# Altium PCB PCB1.PcbDoc (part 1 of 2)
Units mil, origin at the board's own origin, x right, y up, seen from the top; angles counter-clockwise.
Board outline 2312.99 x 1968.58 mil, 4 copper layers (Top Layer, MidLayer1, MidLayer2, Bottom Layer); 130 components, 134 nets, 621 pads, 156 vias.
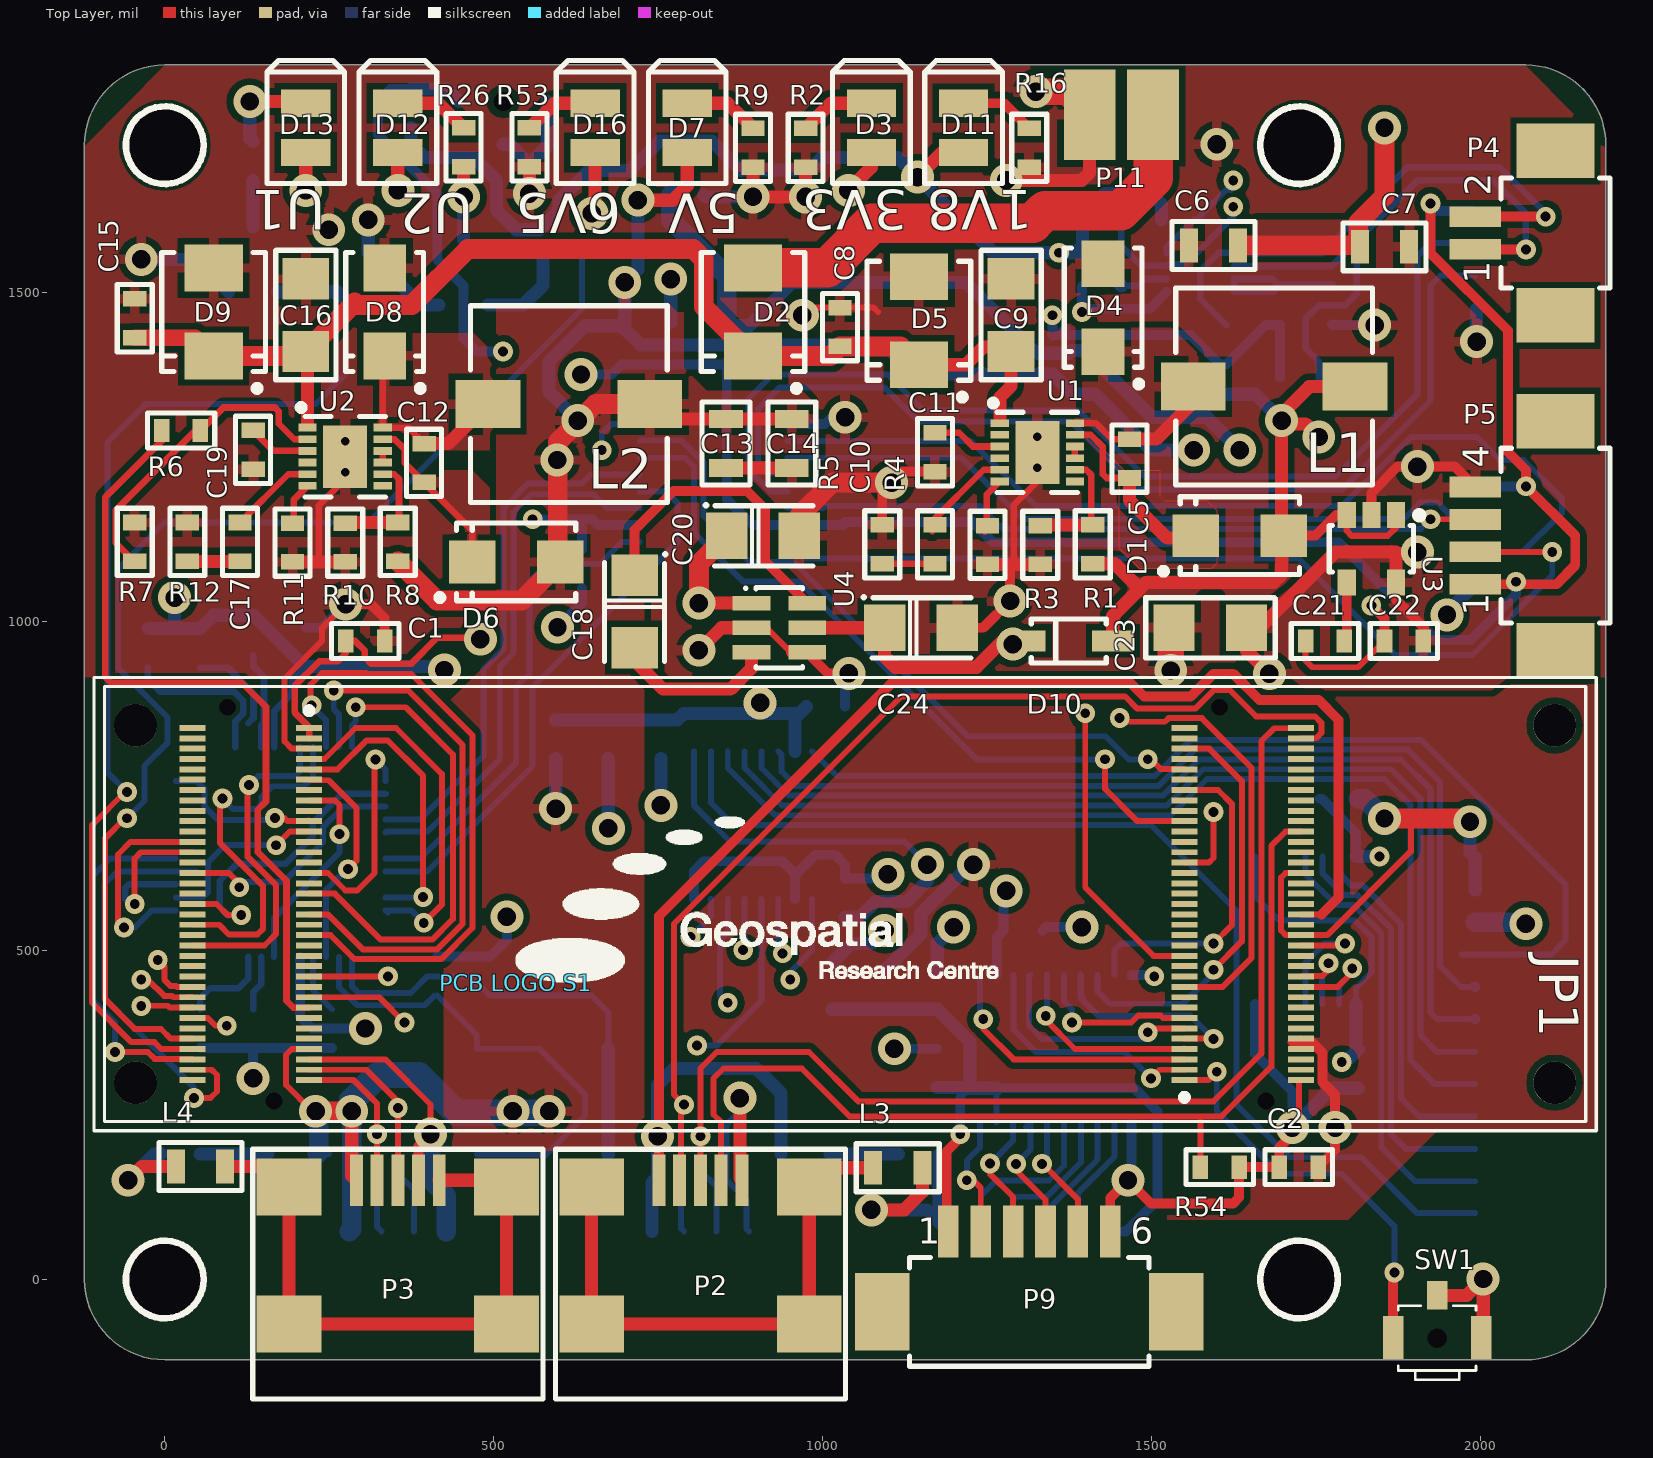
[diagram p0: Top Layer view]
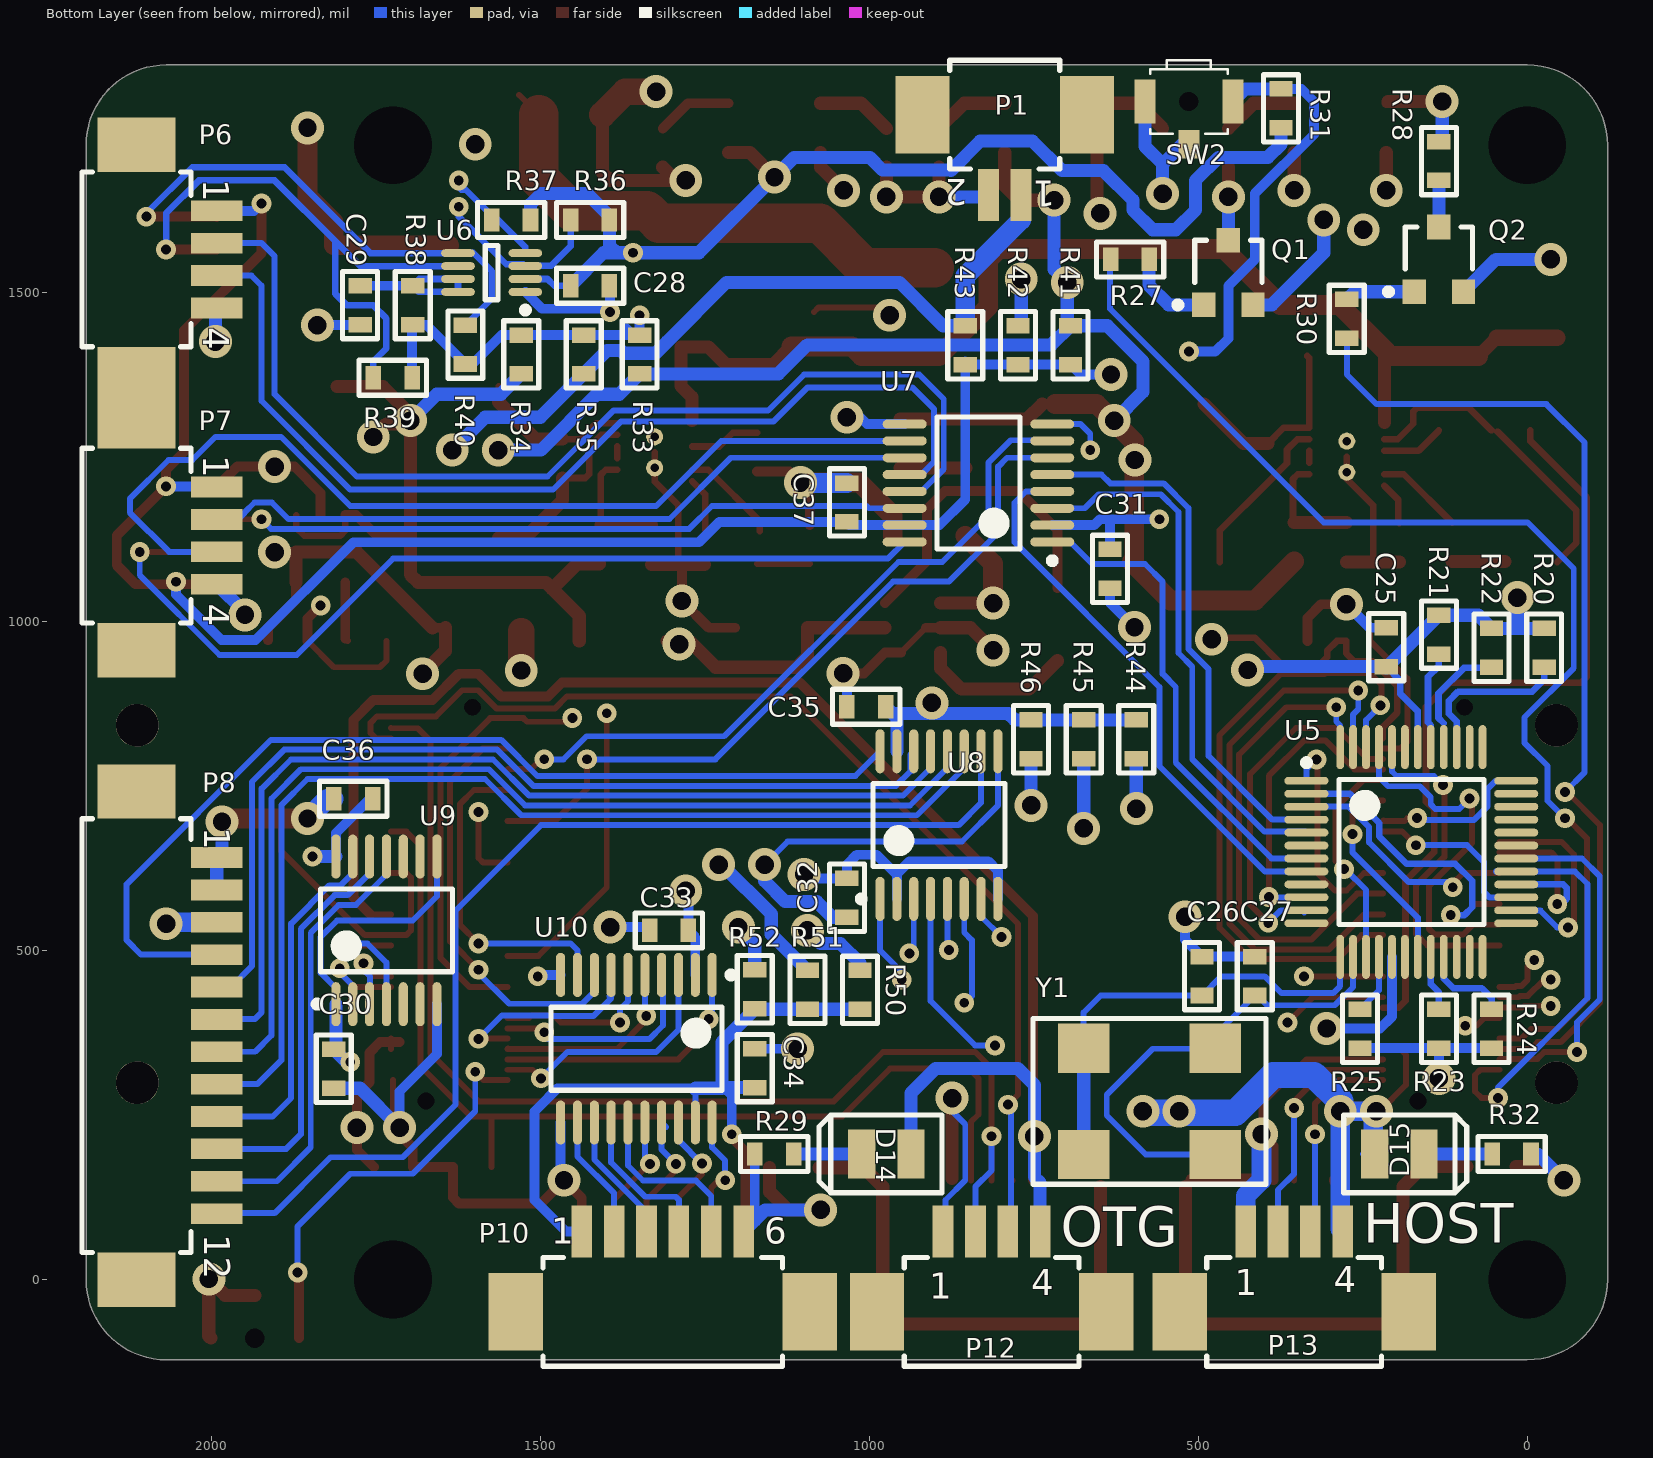
[diagram p1: Bottom Layer view, seen from below]
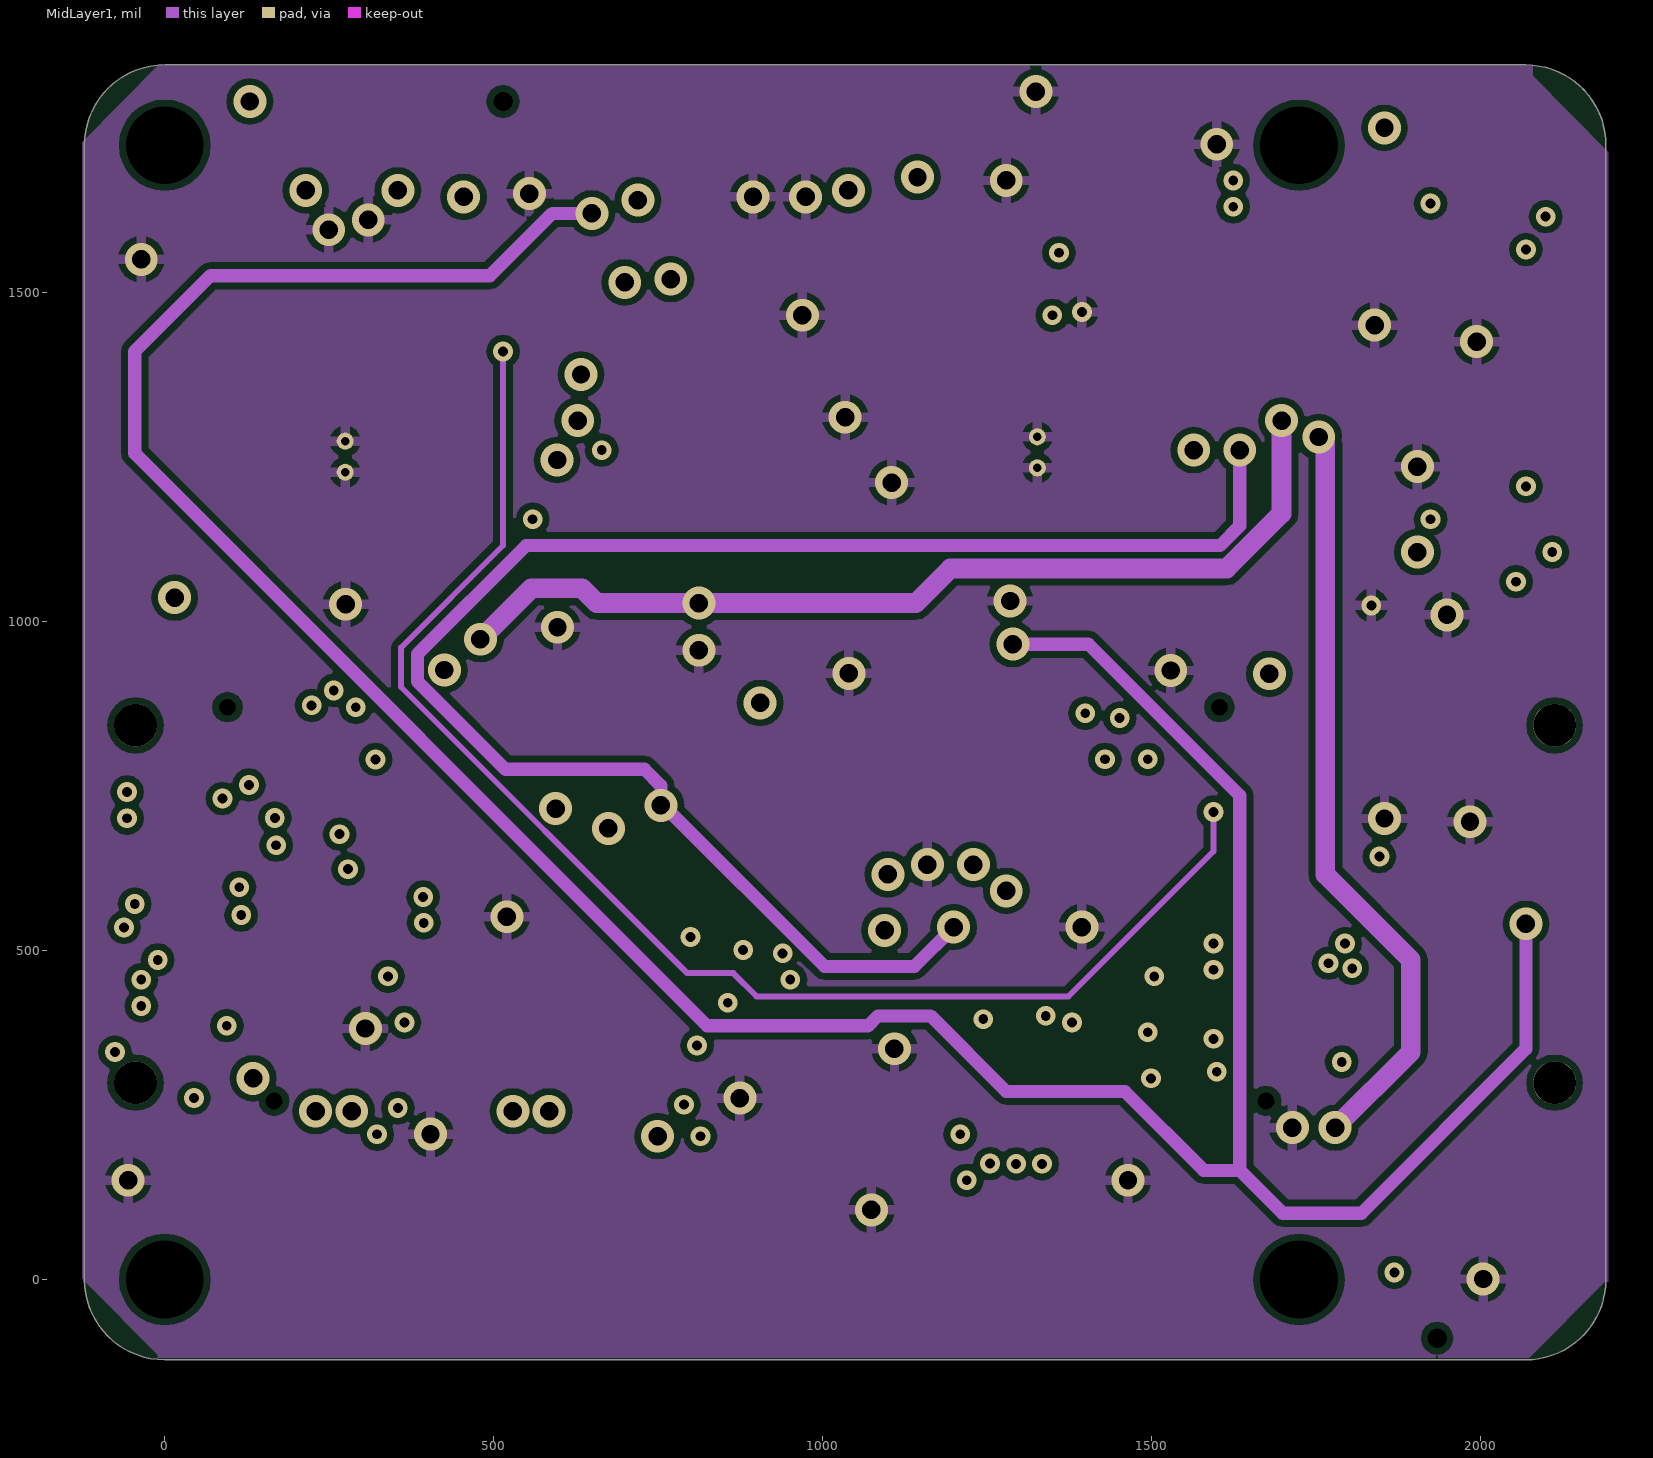
[diagram p2: MidLayer1]
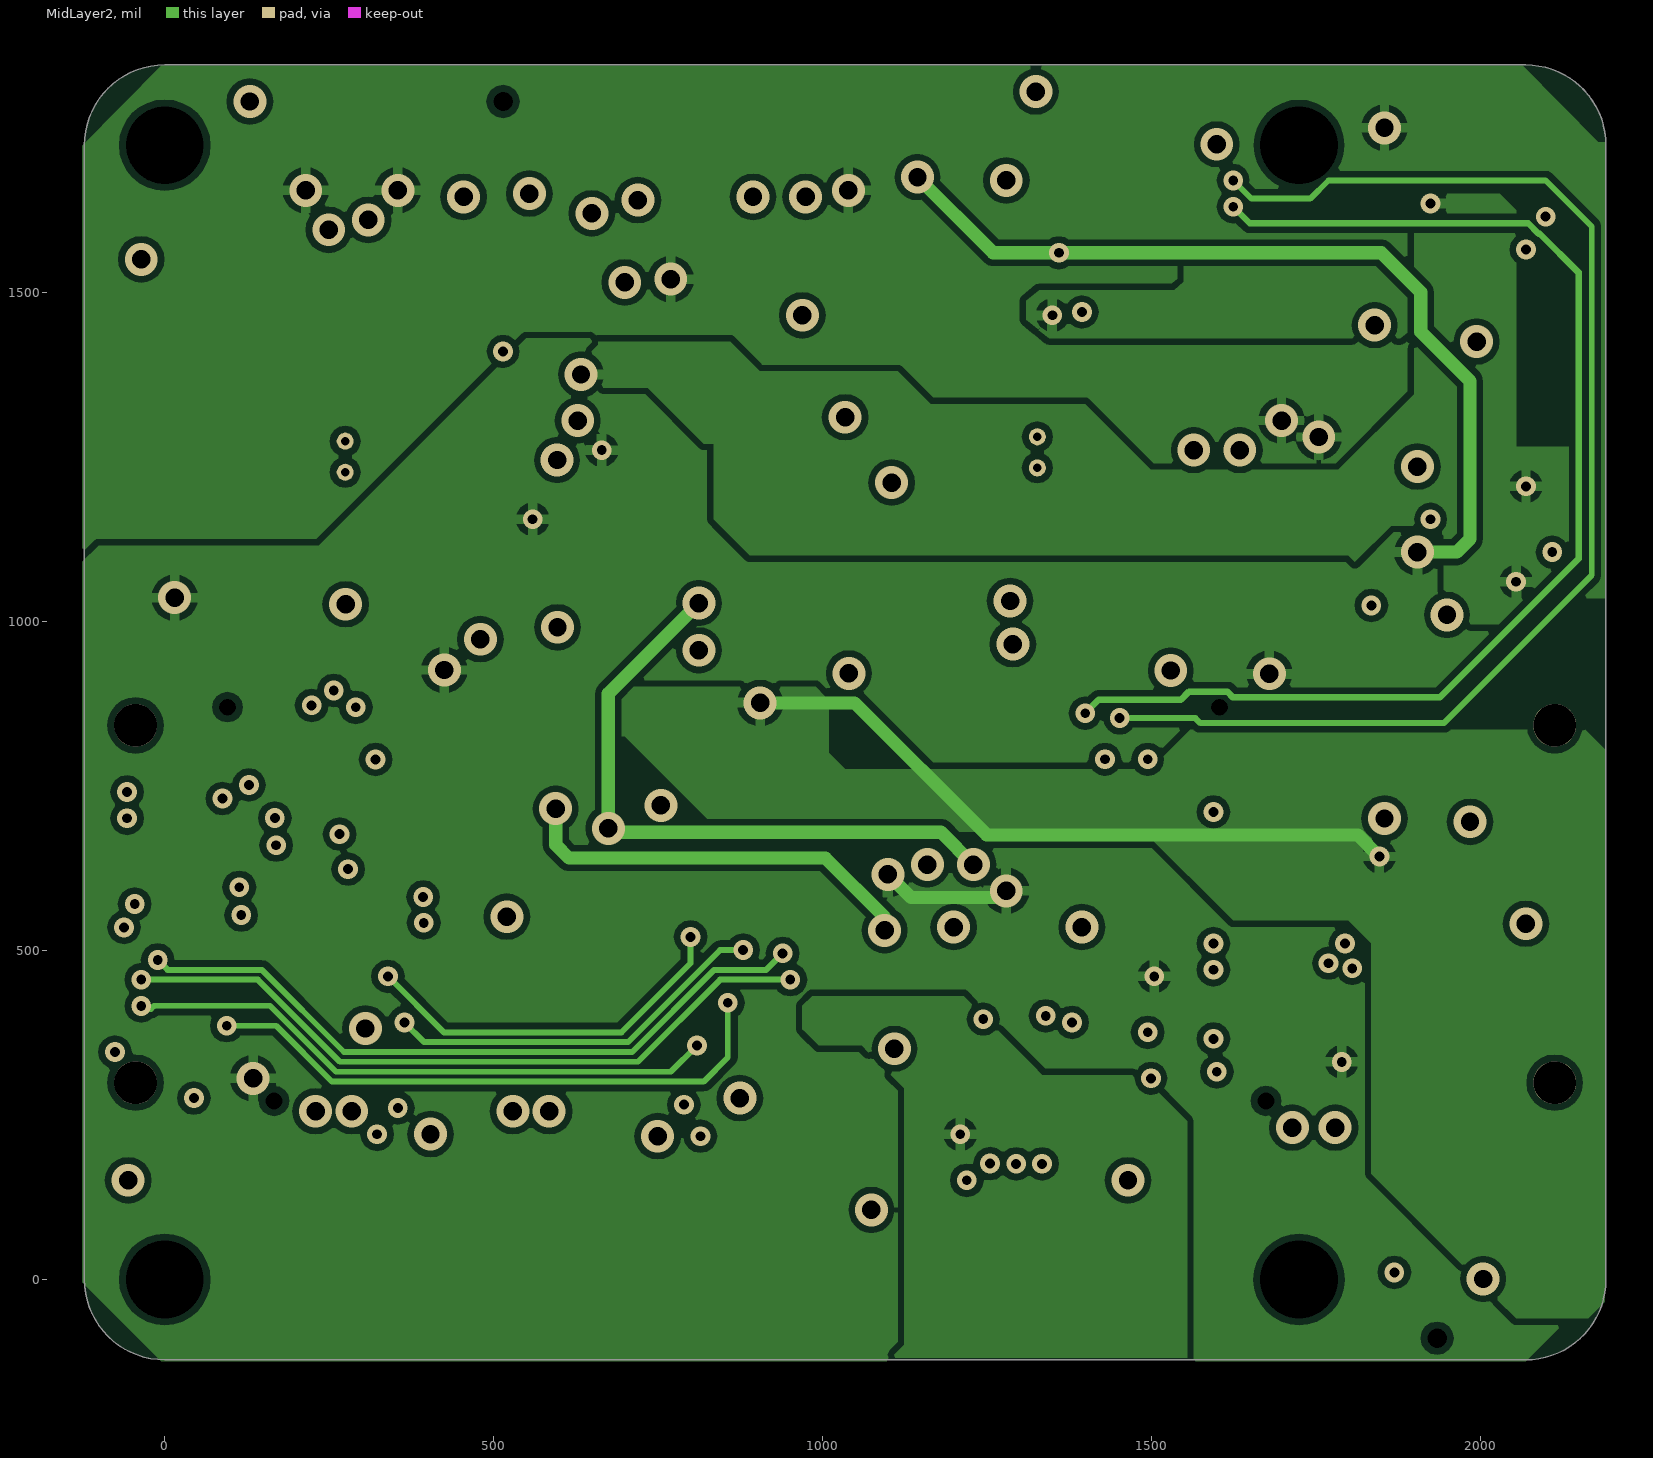
[diagram p3: MidLayer2]

## Layer stack, top to bottom
Top Layer: signal copper 1.4
Dielectric: core 12.6, FR-4, Dk 4.8
MidLayer1: signal copper 1.4
Dielectric: prepreg 12.6, FR-4, Dk 4.8
MidLayer2: signal copper 1.4
Dielectric: core 12.6, FR-4, Dk 4.8
Bottom Layer: signal copper 1.4

## Board outline
-122.05,0 -122.05,1724.41 cw(c0,1724.41) 0,1846.46 0.08,1846.54 2068.9,1846.54 2068.9,1846.46 cw(c2068.9,1724.41) 2190.95,1724.41 2190.95,0 cw(c2068.9,0) 2068.9,-122.05 2068.9,-121.97 0.08,-121.97 0,-122.05 cw(c0,0)

## Design rules (kind name [scope] priority, off if disabled: settings)
Clearance Clearance_1 [InPoly] p1: gap=10
Clearance [All] p2: gap=5.91
ComponentClearance [NOT (HasFootprint('TEST_POINT_0.5mm'))] p1: gap=5.91 collisioncheckmode=3 verticalgap=0 showdistances=FALSE
Height [All] p1: minheight=0 maxheight=10000 prefheight=500
HoleSize [All] p1: absolutevalues=TRUE maxlimit=196.85 minlimit=0.98 maxpercent=80.000 minpercent=20.000
MinimumSolderMaskSliver [All] p1 off: minsoldermaskwidth=9.45
PasteMaskExpansion [All] p1 off: expansion=0
PolygonConnect connect_alll [All vs IsNamedPolygon('GND') Or  IsNamedPolygon('Top Layer-No Net') Or  IsNamedPolygon('Top Layer-No Net') Or  IsNamedPolygon('Top Layer-No Net') Or  IsNamedPolygon('VCC_3V3') Or  IsNamedPolygon('under_gumstix') Or  IsNamedPolygon('VCC_1V8') Or  IsNamedPolygon('VCC_5V') Or  IsNamedPolygon('C5_1') Or  IsNamedPolygon('GND') Or  IsNamedPolygon('VCC_UART') Or  IsNamedPolygon('VCC_I2C') Or  IsNamedPolygon('VCC_SPI') Or  IsNamedPolygon('VCC_IO') Or  IsNamedPolygon('VCC_1V8') Or  IsNamedPolygon('VCC_3v3')] p1: connectstyle=Relief reliefconductorwidth=15 reliefentries=4 polygonreliefangle="90 Angle"
PolygonConnect connect1_5 [All vs IsNamedPolygon('VCC_5V')] p2: connectstyle=Relief reliefconductorwidth=20 reliefentries=4 polygonreliefangle="90 Angle"
PolygonConnect connect1_4 [All vs IsNamedPolygon('Top Layer-No Net')] p3: connectstyle=Relief reliefconductorwidth=20 reliefentries=4 polygonreliefangle="90 Angle"
PolygonConnect connect1_3 [All vs IsNamedPolygon('Top Layer-No Net')] p4: connectstyle=Relief reliefconductorwidth=20 reliefentries=4 polygonreliefangle="90 Angle"
PolygonConnect connect1_2 [All vs IsNamedPolygon('Top Layer-No Net')] p5: connectstyle=Relief reliefconductorwidth=20 reliefentries=4 polygonreliefangle="90 Angle"
PolygonConnect connect1_1 [All vs IsNamedPolygon('Top Layer-No Net')] p6: connectstyle=Relief reliefconductorwidth=20 reliefentries=4 polygonreliefangle="90 Angle"
PolygonConnect poly_connect1 [All vs IsNamedPolygon('GND')] p7: connectstyle=Relief reliefconductorwidth=20 reliefentries=4 polygonreliefangle="90 Angle"
PolygonConnect connect1 [All vs IsNamedPolygon('GND')] p8: connectstyle=Relief reliefconductorwidth=10 reliefentries=4 polygonreliefangle="90 Angle"
PolygonConnect PolygonConnect_4 [All vs IsNamedPolygon('Top Layer-No Net')] p9: connectstyle=Relief reliefconductorwidth=20 reliefentries=4 polygonreliefangle="90 Angle"
PolygonConnect PolygonConnect_3 [All vs IsNamedPolygon('Top Layer-No Net')] p10: connectstyle=Relief reliefconductorwidth=20 reliefentries=4 polygonreliefangle="90 Angle"
PolygonConnect PolygonConnect_2 [All vs IsNamedPolygon('Top Layer-No Net')] p11: connectstyle=Relief reliefconductorwidth=20 reliefentries=4 polygonreliefangle="90 Angle"
PolygonConnect PolygonConnect_1 [All vs IsNamedPolygon('GND')] p12: connectstyle=Relief reliefconductorwidth=20 reliefentries=4 polygonreliefangle="90 Angle"
PolygonConnect [All] p13: connectstyle=Relief reliefconductorwidth=10 reliefentries=4 polygonreliefangle="90 Angle"
RoutingVias [All] p1: holewidth=15 width=30 viastyle="Through Hole" minholewidth=15 minwidth=30 maxholewidth=30 maxwidth=50
SilkToSilkClearance [All] p1 off: silktosilkclearance=10
SilkscreenOverComponentPads [All] p1 off: minsilkscreentomaskgap=10
SolderMaskExpansion SolderMaskExpansion_1 [(IsVia)] p1 off: expansion=0
SolderMaskExpansion [Not (IsVia)] p2 off: expansion=4.02
TestPointUsage [All] p1: valid=0 allowmultiple=FALSE
Testpoint [All] p1: side=15 testpointundercomponent=TRUE minsize=40 maxsize=100 preferedsize=60 minholesize=0 maxholesize=40 preferedholesize=32 testpointgrid=1 style=1023 order=0123456789
Width [All] p1: maxlimit=100 minlimit=6 preferedwidth=10 minimp=50.000000 maximp=50.000000 favimp=50.000000
17 further rules are at their usual default settings.

## Classes and differential pairs
component class "Bus UART": C25 C26 C27 R20 R21 R22 R23 R24 R25 U5 Y1
component class "Level Shifters": C30 C31 C32 C33 C34 C35 C36 C37 P5 P6 P7 P8 P9 P10 R41 R42 R43 R44 R45 R46 R50 R51 R52 U7 U8 U9 U10
component class Overo: C1 C2 JP1 "PCB LOGO S1" SW1
component class Power: C5 C6 C7 C8 C9 C10 C11 C12 C13 C14 C15 C16 C17 C18 C19 C20 C21 C22 C23 C24 D1 D2 D3 D4 D5 D6 D7 D8 D9 D10 D11 D16 L1 L2 P1 P11 R1 R2 R3 R4 R5 R6 R7 R8 R9 R10 R11 R12 R16 R53 U1 U2 U3 U4
component class "USB SPI I2C": C28 C29 D12 D13 D14 D15 L3 L4 P2 P3 P4 P12 P13 Q1 Q2 R26 R27 R28 R29 R30 R31 R32 R33 R34 R35 R36 R37 R38 R39 R40 R54 SW2 U6

## Components (designator, comment, footprint, x,y, rotation, side; value= is the part's Value field where it differs from the comment)
C1 "100nF" 0603 334.33,970.83 r180 top
C2 "100nF" 0603 1694.33,170.83 r0 top
C5 "CP_470n 0603 25V X5R" 0603 1466.54,1277.52 r270 top
C6 "10uF" 0805 1594.33,1570.83 r180 top
C7 "10uF" 0805 1854.33,1570.83 r0 top
C8 "100nF" 0603 1026.54,1477.52 r270 top
C9 "CP_2u2 1206" 1206 1286.54,1410.83 r90 top
C10 "CP_330pF 0603" 0603 1170.87,1147.17 r270 top
C11 "CP_470n 0603 25V X5R" 0603 1170.87,1287.17 r270 top
C12 "CP_470n 0603 25V X5R" 0603 394.33,1270.83 r270 top
C13 "10uF" 0805 854.33,1270.83 r270 top
C14 "10uF" 0805 954.33,1270.83 r270 top
C15 "100nF" 0603 -45.67,1490.83 r270 top
C16 "CP_2u2 1206" 1206 214.33,1410.83 r90 top
C17 "CP_330pF 0603" 0603 114.33,1150.83 r270 top
C18 "10uF" 1206P 714.33,1070.83 r270 top
C19 "CP_470n 0603 25V X5R" 0603 134.33,1290.83 r270 top
C20 "10uF" 1206P 854.33,1130.83 r0 top
C21 "10n" 0603 1734.33,970.83 r0 top
C22 "100nF" 0603 1854.33,970.83 r0 top
C23 "CP_2u2_50V_1206" 1206 1534.33,990.83 r0 top
C24 "10uF" 1206P 1094.33,990.83 r0 top
C25 "100nF" 0603 214.33,990.83 r270 bottom
C26 "18pF" 0603 494.33,490.83 r270 bottom
C27 "18pF" 0603 414.33,490.83 r270 bottom
C28 "100nF" 0603 1454.33,1510.83 r180 bottom
C29 "100nF" 0603 1774.33,1510.83 r270 bottom
C30 "100nF" 0603 1814.33,290.83 r90 bottom
C31 "100nF" 0603 634.33,1050.83 r90 bottom
C32 "100nF" 0603 1034.33,550.83 r90 bottom
C33 "100nF" 0603 1334.33,530.83 r180 bottom
C34 "100nF" 0603 1174.33,350.83 r270 bottom
C35 "100nF" 0603 1034.33,870.83 r180 bottom
C36 "100nF" 0603 1814.33,730.83 r180 bottom
C37 "100nF" 0603 1034.33,1210.83 r270 bottom
D1 "2A/40V" SMA_DIODE 1634.33,1130.83 r180 top
D2 "2A/100V" SMB_DIODE 894.33,1470.83 r270 top
D3 "LED Green" Diode_0805 1074.33,1750.83 r90 top
D4 "2A/40V" SMA_DIODE 1426.54,1477.52 r270 top
D5 "TVS 40V" SMB_DIODE 1146.54,1457.52 r270 top
D6 "2A/40V" SMA_DIODE 534.33,1090.83 r180 top
D7 "LED Green" Diode_0805 794.33,1750.83 r90 top
D8 "2A/40V" SMA_DIODE 334.33,1470.83 r270 top
D9 "TVS 40V" SMB_DIODE 74.33,1470.83 r270 top
D10 "MBR0520LT1G" SOD123 1374.33,970.83 r180 top
D11 "LED Red" Diode_0805 1214.33,1750.83 r90 top
D12 "LED Red" Diode_0805 354.33,1750.83 r90 top
D13 "LED Green" Diode_0805 214.33,1750.83 r90 top
D14 "LED Green" Diode_0805 974.33,190.83 r0 bottom
D15 "LED Green" Diode_0805 194.33,190.83 r180 bottom
D16 "LED Green" Diode_0805 654.33,1750.83 r90 top
JP1 "Overo Earth" OVERO 1034.33,570.83 r0 top
L1 "10uH" WE-PD 1686.54,1357.52 r0 top
L2 "10uH" WE-PD 614.33,1330.83 r0 top
L3 "22uH" 0805 1114.33,170.83 r0 top
L4 "22uH" 0805 54.33,170.83 r180 top
P1 "2 Pin Header" CONN_2X1_SMT_RA_1.25MM 794.33,1770.83 r0 bottom
P2 "MINI-USB Type B" Hir_MINI_USB_B 814.33,150.83 r0 top
P3 "MINI-USB Type B" Hir_MINI_USB_B 354.33,150.83 r0 top
P4 "2 Pin Header" CONN_2X1_SMT_RA_1.25MM 2114.33,1590.83 r90 top
P5 "4 Pin Header" CONN_4X1_SMT_RA_1.25MM 2114.33,1130.83 r90 top
P6 "4 Pin Header" CONN_4X1_SMT_RA_1.25MM 2114.33,1550.83 r270 bottom
P7 "4 Pin Header" CONN_4X1_SMT_RA_1.25MM 2114.33,1130.83 r270 bottom
P8 "12 Pin Header" CONN_12X1_SMT_RA_1.25MM 2114.33,370.83 r270 bottom
P9 "6 Pin Header" CONN_6X1_SMT_RA_1.25MM 1314.33,-49.17 r0 top
P10 "6 Pin Header" CONN_6X1_SMT_RA_1.25MM 1314.33,-49.17 r180 bottom
P11 "2 Pin Header" POWER_PADS 1454.33,1770.83 r180 top
P12 "4 Pin Header" CONN_4X1_SMT_RA_1.25MM 814.33,-49.17 r180 bottom
P13 "4 Pin Header" CONN_4X1_SMT_RA_1.25MM 354.33,-49.17 r180 bottom
"PCB LOGO S1" "GRC_LOGO_SMALL" GRC_LOGO_20x10MM 534.33,450.83 r0 top
Q1 "BC847" SOT23 454.33,1530.83 r180 bottom
Q2 "BC847" SOT23 134.33,1550.83 r180 bottom
R1 "24k9" 0603 1410.87,1147.17 r270 top
R2 "150R" 0603 974.33,1690.83 r90 top
R3 "8k06" 0603 1330.87,1087.17 r90 top
R4 "53k6" 0603 1250.87,1087.17 r90 top
R5 "40k2" 0603 1090.87,1147.17 r270 top
R6 "0R0" 0603 54.33,1290.83 r180 top
R7 "1k" 0603 -45.67,1150.83 r270 top
R8 "42k2" 0603 354.33,1150.83 r270 top
R9 "330R" 0603 894.33,1690.83 r90 top
R10 "8k06" 0603 274.33,1090.83 r90 top
R11 "53k6" 0603 194.33,1090.83 r90 top
R12 "40k2" 0603 34.33,1150.83 r270 top
R16 "150R" 0603 1314.33,1690.83 r90 top
R20 "100k" 0603 -25.67,930.83 r90 bottom
R21 "100k" 0603 134.33,950.83 r90 bottom
R22 "100k" 0603 54.33,930.83 r90 bottom
R23 "100k" 0603 134.33,410.83 r270 bottom
R24 "100k" 0603 54.33,410.83 r270 bottom
R25 "100k" 0603 254.33,410.83 r270 bottom
R26 "180R" 0603 454.33,1750.83 r270 top
R27 "5k6" 0603 574.33,1550.83 r0 bottom
R28 "150R" 0603 134.33,1729.88 r270 bottom
R29 "330R" 0603 1115.28,190.83 r0 bottom
R30 "5k6" 0603 274.33,1489.88 r270 bottom
R31 "100k" 0603 374.33,1750.83 r90 bottom
R32 "330R" 0603 -5.67,190.83 r0 bottom
R33 "0R0" 0603 1349.33,1376.77 r90 bottom
R34 "0R0" 0603 1529.33,1376.77 r90 bottom
R35 "0R0" 0603 1434.33,1376.77 r90 bottom
R36 "57k" 0603 1454.33,1610.83 r180 bottom
R37 "57k" 0603 1574.33,1610.83 r180 bottom
R38 "200k" 0603 1694.33,1510.83 r270 bottom
R39 "57k" 0603 1754.33,1370.83 r180 bottom
R40 "57k" 0603 1614.33,1450.83 r270 bottom
R41 "0R0" 0603 694.33,1449.88 r270 bottom
R42 "0R0" 0603 774.33,1449.88 r270 bottom
R43 "0R0" 0603 854.33,1449.88 r270 bottom
R44 "0R0" 0603 594.33,791.77 r90 bottom
R45 "0R0" 0603 674.33,791.77 r90 bottom
R46 "0R0" 0603 754.33,791.77 r90 bottom
R50 "0R0" 0603 1014.33,469.88 r270 bottom
R51 "0R0" 0603 1094.33,469.88 r270 bottom
R52 "0R0" 0603 1174.33,470.83 r270 bottom
R53 "523R" 0603 554.33,1750.83 r270 top
R54 "0R0" 0603 1574.33,170.83 r0 top
SW1 "Push Button Switch" PUSHBUTTON_B3U 1934.33,-89.17 r180 top
SW2 "Push Button Switch" PUSHBUTTON_B3U 514.33,1790.83 r180 bottom
U1 "IC_LT3500EDD" 12-DFN 1326.54,1257.52 r270 top
U2 "IC_LT3500EDD" 12-DFN 274.33,1250.83 r270 top
U3 "MIC5247-1.8" SOT23-5 1834.33,1110.83 r180 top
U4 "LM2665" SOT23-6 934.33,990.83 r270 top
U5 "C16C852LIB-S" LQFP-48 176.18,649.88 r180 bottom
U6 "PCA9306DC" VSSOP-8 1574.33,1530.83 r0 bottom
U7 "IC_TXB0106PWR" TSSOP-16_PW 834.33,1210.83 r0 bottom
U8 "IC_TXB0106PWR" TSSOP-16_PW 894.33,690.83 r90 bottom
U9 "IC_TXB0104PWR" TSSOP-14_PW 1734.33,530.83 r90 bottom
U10 "IC_TXB0108PWR" TSSOP-20_PW 1354.33,350.83 r270 bottom
Y1 "18.432MHZ" ConWin_Xtal 574.33,270.83 r180 bottom

## Footprints (in the part's own frame and the unit in brackets; to place one, negate y for a bottom-side part, rotate by r counter-clockwise, add the part's x,y. Pads: shape width x height; smd on the part's side, far side on the other; paste and mask are expansions set on the pad)
12-DFN [mm] "DD Package - 12-Lead Plastic DFN (3mm × 3mm)"
  rect 0.3x0.7 smd: 1(-1.125,-1.45) 2(-0.675,-1.45) 3(-0.225,-1.45) 4(0.225,-1.45) 5(0.675,-1.45) 6(1.125,-1.45) 7(1.125,1.45) 8(0.675,1.45) 9(0.225,1.45) 10(-0.225,1.45) 11(-0.675,1.45) 12(-1.125,1.45)
  round 0.66 hole 0.33: 13(-0.6,0) 13(0.6,0)
  rect 2.43x1.7 smd: 13(0,0)
  silkscreen extent -2.02,-1.82 1.55,1.55
0603 [mm] "Non polarized 0603 footprint"
  rect 0.6x0.9 smd: 1(0,0) 2(1.5,0)
  silkscreen extent -0.55,-0.67 2.05,0.67
0805 [mm]
  rect 0.7x1.3 smd: 1(-0.95,-0.025) 2(0.95,-0.025)
  silkscreen extent -1.6,-0.95 1.6,0.9
1206 [mm] "Non-polarized 1206 footprint"
  rect 1.6x1.8 smd: 1(0,0) 2(2.8,0)
  silkscreen extent -1.09,-1.17 3.91,1.16
1206P [mm] "Polarized 1206 footprint"
  rect 1.6x1.8 smd: 1(0,0) 2(2.8,0)
  silkscreen extent -0.8,-1.17 3.32,1.17
CONN_2X1_SMT_RA_1.25MM [mm] "PicoBlade 5326 Series Header"
  rect 0.8x2 smd: 1(-0.625,3.1) 2(0.625,3.1)
  rect 2.1x3 smd: " "(3.175,0) ""(-3.175,0)
  silkscreen extent -2.12,-2.1 2.12,2.1
CONN_4X1_SMT_RA_1.25MM [mm] "PicoBlade 5326 Series Header"
  rect 0.8x2 smd: 1(-1.875,3.1) 2(-0.625,3.1) 3(0.625,3.1) 4(1.875,3.1)
  rect 2.1x3 smd: " "(4.425,0) ""(-4.425,0)
  silkscreen extent -3.37,-2.1 3.37,2.1
CONN_6X1_SMT_RA_1.25MM [mm] "PicoBlade 5326 Series Header"
  rect 0.8x2 smd: 1(-3.125,3.1) 2(-1.875,3.1) 3(-0.625,3.1) 4(0.625,3.1) 5(1.875,3.1) 6(3.125,3.1)
  rect 2.1x3 smd: " "(5.675,0) ""(-5.675,0)
  silkscreen extent -4.62,-2.1 4.62,2.1
CONN_12X1_SMT_RA_1.25MM [mm] "PicoBlade 5326 Series Header"
  rect 0.8x2 smd: 1(-6.875,3.1) 2(-5.625,3.1) 3(-4.375,3.1) 4(-3.125,3.1) 5(-1.875,3.1) 6(-0.625,3.1) 7(0.625,3.1) 8(1.875,3.1) 9(3.125,3.1) 10(4.375,3.1) 11(5.625,3.1) 12(6.875,3.1)
  rect 2.1x3 smd: " "(9.425,0) ""(-9.425,0)
  silkscreen extent -8.37,-2.1 8.37,2.1
ConWin_Xtal [mm] "ConWin Xtal FootPrint"
  rect 2x1.9 smd: 1(-2.54,-2.05) 1(-2.54,2.05) 2(2.54,-2.05) 2(2.54,2.05)
  silkscreen extent -4.5,-3.2 4.5,3.2, body extent -3.88,-2.54 3.81,2.61, height 1.77
Diode_0805 [mm] "0805 SMD diode"
  rect 1.05x1.9 smd: 1(-0.95,0) 2(0.95,0)
  silkscreen extent -2.15,-1.5 2.6,1.5
GRC_LOGO_20x10MM [mil] "GRC logo 2x1cm"
  silkscreen extent -1,2 733,253
Hir_MINI_USB_B [mm] "Mini-USB Receptacle Type B - Metal Shield - SMT - With Positioning Post"
  rect 0.5x2 smd: 1(-1.6,0) 2(-0.8,0) 3(0,0) 4(0.8,0) 5(1.6,0)
  rect 2.5x2.2 smd: 6(-4.2,-5.55) 6(-4.2,-0.25) 6(4.2,-5.55) 6(4.2,-0.25)
  silkscreen extent -5.6,-8.45 5.6,1.2
LQFP-48 [mm] "TSQFP, 48-Leads, Body 9.1x9.1mm (max), Pitch 0.50mm, IPC Medium Density"
  oval 1.7x0.3 smd: 1(-4.05,2.75) 2(-4.05,2.25) 3(-4.05,1.75) 4(-4.05,1.25) 5(-4.05,0.75) 6(-4.05,0.25) 7(-4.05,-0.25) 8(-4.05,-0.75) 9(-4.05,-1.25) 10(-4.05,-1.75) 11(-4.05,-2.25) 12(-4.05,-2.75) 25(4.05,-2.75) 26(4.05,-2.25) 27(4.05,-1.75) 28(4.05,-1.25) 29(4.05,-0.75) 30(4.05,-0.25) 31(4.05,0.25) 32(4.05,0.75) 33(4.05,1.25) 34(4.05,1.75) 35(4.05,2.25) 36(4.05,2.75)
  oval 0.3x1.7 smd: 13(-2.75,-4.05) 14(-2.25,-4.05) 15(-1.75,-4.05) 16(-1.25,-4.05) 17(-0.75,-4.05) 18(-0.25,-4.05) 19(0.25,-4.05) 20(0.75,-4.05) 21(1.25,-4.05) 22(1.75,-4.05) 23(2.25,-4.05) 24(2.75,-4.05) 37(2.75,4.05) 38(2.25,4.05) 39(1.75,4.05) 40(1.25,4.05) 41(0.75,4.05) 42(0.25,4.05) 43(-0.25,4.05) 44(-0.75,4.05) 45(-1.25,4.05) 46(-1.75,4.05) 47(-2.25,4.05) 48(-2.75,4.05)
  silkscreen extent -4.18,-2.8 2.8,3.57, body extent -3.5,-3.5 3.5,3.5, height 1.6
OVERO [mm] "Overo Earth support"
  rect 1x0.23 smd: 1(13.1,-6.8) 2(13.1,-6.4) 3(13.1,-6) 4(13.1,-5.6) 5(13.1,-5.2) 6(13.1,-4.8) 7(13.1,-4.4) 8(13.1,-4) 9(13.1,-3.6) 10(13.1,-3.2) 11(13.1,-2.8) 12(13.1,-2.4) 13(13.1,-2) 14(13.1,-1.6) 15(13.1,-1.2) 16(13.1,-0.8) 17(13.1,-0.4) 18(13.1,0) 19(13.1,0.4) 20(13.1,0.8) 21(13.1,1.2) 22(13.1,1.6) 23(13.1,2) 24(13.1,2.4) 25(13.1,2.8) 26(13.1,3.2) 27(13.1,3.6) 28(13.1,4) 29(13.1,4.4) 30(13.1,4.8) 31(13.1,5.2) 32(13.1,5.6) 33(13.1,6) 34(13.1,6.4) 35(13.1,6.8) 36(17.6,6.8) 36_(-25.2,-6.8) 37(17.6,6.4) 37_(-25.2,-6.4) 38(17.6,6) 38_(-25.2,-6) 39(17.6,5.6) 39_(-25.2,-5.6) 40(17.6,5.2) 40_(-25.2,-5.2) 41(17.6,4.8) 41_(-25.2,-4.8) 42(17.6,4.4) 42_(-25.2,-4.4) 43(17.6,4) 43_(-25.2,-4) 44(17.6,3.6) 44_(-25.2,-3.6) 45(17.6,3.2) 45_(-25.2,-3.2) 46(17.6,2.8) 46_(-25.2,-2.8) 47(17.6,2.4) 47_(-25.2,-2.4) 48(17.6,2) 48_(-25.2,-2) 49(17.6,1.6) 49_(-25.2,-1.6) 50(17.6,1.2) 50_(-25.2,-1.2) 51(17.6,0.8) 51_(-25.2,-0.8) 52(17.6,0.4) 52_(-25.2,-0.4) 53(17.6,0) 53_(-25.2,0) 54(17.6,-0.4) 54_(-25.2,0.4) 55(17.6,-0.8) 55_(-25.2,0.8) 56(17.6,-1.2) 56_(-25.2,1.2) 57(17.6,-1.6) 57_(-25.2,1.6) 58(17.6,-2) 58_(-25.2,2) 59(17.6,-2.4) 59_(-25.2,2.4) 60(17.6,-2.8) 60_(-25.2,2.8) 61(17.6,-3.2) 61_(-25.2,3.2) 62(17.6,-3.6) 62_(-25.2,3.6) 63(17.6,-4) 63_(-25.2,4) 64(17.6,-4.4) 64_(-25.2,4.4) 65(17.6,-4.8) 65_(-25.2,4.8) 66(17.6,-5.2) 66_(-25.2,5.2) 67(17.6,-5.6) 67_(-25.2,5.6) 68(17.6,-6) 68_(-25.2,6) 69(17.6,-6.4) 69_(-25.2,6.4) 70(17.6,-6.8) 70_(-25.2,6.8) _1(-20.7,6.8) _2(-20.7,6.4) _3(-20.7,6) _4(-20.7,5.6) _5(-20.7,5.2) _6(-20.7,4.8) _7(-20.7,4.4) _8(-20.7,4) _9(-20.7,3.6) _10(-20.7,3.2) _11(-20.7,2.8) _12(-20.7,2.4) _13(-20.7,2) _14(-20.7,1.6) _15(-20.7,1.2) _16(-20.7,0.8) _17(-20.7,0.4) _18(-20.7,0) _19(-20.7,-0.4) _20(-20.7,-0.8) _21(-20.7,-1.2) _22(-20.7,-1.6) _23(-20.7,-2) _24(-20.7,-2.4) _25(-20.7,-2.8) _26(-20.7,-3.2) _27(-20.7,-3.6) _28(-20.7,-4) _29(-20.7,-4.4) _30(-20.7,-4.8) _31(-20.7,-5.2) _32(-20.7,-5.6) _33(-20.7,-6) _34(-20.7,-6.4) _35(-20.7,-6.8)
  round 1.65 hole 1.65 unplated: A(-27.4,6.9) A(27.4,6.9) B(-27.4,-6.9) B(27.4,-6.9)
  round 0 hole 0.65 unplated: E(-23.85,7.6) F(-22.05,-7.6) G(14.45,7.6) H(16.25,-7.6)
  silkscreen extent -29,-8.75 29,8.75
POWER_PADS [mm] "Power Supply Pads"
  rect 2x3.5 smd: 1(-1.225,0) 2(1.225,0)
PUSHBUTTON_B3U [mm] "Omron ultra small tactile switch"
  round 0 hole 0.75: 0(0,0)
  rect 0.8x1.7 smd: 1(-1.7,0) 2(1.7,0)
  rect 0.8x1.1 smd: 3(0,-1.65)
  silkscreen extent -1.5,-1.25 1.5,1.6
SMA_DIODE [mm] "Diode SMA package"
  rect 1.8x1.65 smd: 1(-1.7,0) 2(1.7,0)
  silkscreen extent -2.3,-1.5 3.07,1.5
SMB_DIODE [mm] "Molded Diode, 2-Leads, Body 4.6x3.9mm, IPC Medium Density"
  rect 1.8x2.25 smd: 1(-1.7,0) 2(1.7,0)
  silkscreen extent -2.3,-2 3.07,2
SOD123 [mm] "SOD-123; 2 Leads; Body 2.7 x 1.6 mm, (LxW)"
  rect 1.6x0.8 smd: 1(-1.7,0) 2(1.7,0)
  silkscreen extent -1.45,-0.85 1.45,0.85
SOT23 [mm] "SOT-23; 3 Leads; Body 3.0 x 2.6 mm, inc. leads (LxW max)"
  rect 0.9x0.95 smd: 1(-0.95,-1.25) 2(0.95,-1.25) 3(0,1.25)
  silkscreen extent -2.08,-1.37 1.3,1.25
SOT23-5 [mm] "SOT23, 5 leads"
  rect 0.7x1 smd: 1(-0.95,-1.3) 2(0,-1.3) 3(0.95,-1.3) 4(0.95,1.3) 5(-0.95,1.3)
  silkscreen extent -1.88,-1.32 1.63,0.9
SOT23-6 [mm] "SOT-23/SC-74A; 6 Leads; Body 3.1 x 3 mm, inc. leads (LxW max)"
  rect 0.55x1.45 smd: 1(-0.95,-1.075) 2(0,-1.075) 3(0.95,-1.075) 4(0.95,1.075) 5(0,1.075) 6(-0.95,1.075)
  silkscreen extent -1.57,-1.35 1.55,0.9
TSSOP-14_PW [mm] "TSOP, 14-Leads, Body 5.1x4.5mm (max), Pitch 0.65mm, IPC Medium Density"
  oval 1.7x0.35 smd: 1(-2.85,1.95) 2(-2.85,1.3) 3(-2.85,0.65) 4(-2.85,0) 5(-2.85,-0.65) 6(-2.85,-1.3) 7(-2.85,-1.95) 8(2.85,-1.95) 9(2.85,-1.3) 10(2.85,-0.65) 11(2.85,0) 12(2.85,0.65) 13(2.85,1.3) 14(2.85,1.95)
  silkscreen extent -2.97,-2.55 1.6,2.8, body extent -2.25,-2.55 2.25,2.55, height 1.2
TSSOP-16_PW [mm] "TSOP, 16-Leads, Body 5.1x4.5mm (max), Pitch 0.65mm, IPC Medium Density"
  oval 1.7x0.35 smd: 1(-2.85,2.275) 2(-2.85,1.625) 3(-2.85,0.975) 4(-2.85,0.325) 5(-2.85,-0.325) 6(-2.85,-0.975) 7(-2.85,-1.625) 8(-2.85,-2.275) 9(2.85,-2.275) 10(2.85,-1.625) 11(2.85,-0.975) 12(2.85,-0.325) 13(2.85,0.325) 14(2.85,0.975) 15(2.85,1.625) 16(2.85,2.275)
  silkscreen extent -2.97,-2.55 1.6,3.12, body extent -2.25,-2.55 2.25,2.55, height 1.2
TSSOP-20_PW [mm] "TSOP, 20-Leads, Body 6.6x4.5mm (max), Pitch 0.65mm, IPC Medium Density"
  oval 1.7x0.35 smd: 1(-2.85,2.925) 2(-2.85,2.275) 3(-2.85,1.625) 4(-2.85,0.975) 5(-2.85,0.325) 6(-2.85,-0.325) 7(-2.85,-0.975) 8(-2.85,-1.625) 9(-2.85,-2.275) 10(-2.85,-2.925) 11(2.85,-2.925) 12(2.85,-2.275) 13(2.85,-1.625) 14(2.85,-0.975) 15(2.85,-0.325) 16(2.85,0.325) 17(2.85,0.975) 18(2.85,1.625) 19(2.85,2.275) 20(2.85,2.925)
  silkscreen extent -2.97,-3.3 1.6,3.77, body extent -2.25,-3.3 2.25,3.3, height 1.2
VSSOP-8 [mm] "TSSOP, 8-Leads, Body 2.1x2.4mm (max), Pitch 0.50mm, IPC Medium Density"
  oval 1.3x0.3 smd: 1(-1.3,0.75) 2(-1.3,0.25) 3(-1.3,-0.25) 4(-1.3,-0.75) 5(1.3,-0.75) 6(1.3,-0.25) 7(1.3,0.25) 8(1.3,0.75)
  silkscreen extent -1.42,-1.05 0.25,1.57, body extent -1.2,-1.05 1.2,1.05, height 1
WE-PD [mm] "Inductor 7.6x7.6mm"
  rect 2.5x1.85 smd: 1(-3.125,0) 2(3.125,0)
  silkscreen extent -3.8,-3.8 3.8,3.8

## Part data
C1 C2 C8 C15 C21 C22 C25 C28 C29 C30 C31 C32 C33 C34 C35 C36 C37: library part "CP_100nF 0603", "CAP CER .10UF 50V X5R 0603"
C5 C11 C12 C19: "CAP CER .47UF 25V X5R 0603"
C6 C7 C13 C14: library part "CP_10uF 0805", "CAP 10uF 10% 10V X5R 0805"
C9 C16 C23: "CAP CER 2u2 50V Y5V 1206"
C10 C17: "CAP 330PF 50V CERAMIC X7R 0603"
C18 C20 C24: library part CP_TANT_10uF_1206, "CAP 10uF 20% 10V 300mOhm 1206"
C26 C27: library part "CP_18pF 0603", "CAP CER 18PF 50V 5% C0G 0603"
D1 D4 D6 D8: library part DS_B240A-13-F, "Schottky Diode - 2A/40V"
D2: library part DS_SS2H10-E3/52T, "Schottky Diode - 2A/100V"
D3 D7 D13 D14 D15 D16: library part "DL_LED Green 0805", "Green LED 0805"
D5 D9: library part "DZ_40v TVS", "DIODE TVS 40V 600W UNIDIR  SMB"
D10: library part DS_MBR0520LT1G, "DIODE SCHOTTKY 20V 0.5A SOD123"
D11: library part "DL_LED 1.7V Red 0805", "Red LED 1.7V 0805"
D12: library part "DL_LED Red 0805", "Red LED 0805"
JP1: library part UN_GUMSTIX_OVERO_EARTH, "Gumstix Overo OMAP35xx Computer Module"
L1 L2: library part "IN_10uH 2A SMT", "INDUCTOR POWER 10UH 2.0A SMD"
L3 L4: library part "IN_22uH 100mA 0805", "Inductor 22uH 100mA 10% 0805"
P1 P4: library part "JP_2PIN HDR_SMT_RA_MOLEX", "CONN HDR VERT 2POS .100\" SNGL"
P2 P3: library part "JP_MINIUSB type B_1", "MINI-USB Type B Single Connector"
P5 P6 P7 P12 P13: library part "JP_4PIN HDR_SMT_RA_MOLEX", "CONN HDR VERT 4POS .100\" SNGL"
P8: library part "JP_12PIN HDR_SMT_RA_MOLEX", "CONN HDR VERT 12POS .100\" SNGL"
P9 P10: library part "JP_6PIN HDR_SMT_RA_MOLEX", "CONN HDR VERT 6POS .100\" SNGL"
P11: library part "JP_2PIN HDR_SMT_RA_MOLEX"
"PCB LOGO S1": "GRC Logo 20x10mm"
Q1 Q2: library part TN_BC847, "TRANS NPN GP 100MA 45V SOT23"
R1: library part "RS_24k9 0603", "RES 24.9K OHM 1/10W 1% 0603 SMD"
R2 R28: library part "RS_150R 0603", "RES 150 OHM 1/10W 1% 0603 SMD"
R3 R10: library part "RS_8k06 0603", "RES 8k06 OHM 1/10W 1% 0603 SMD"
R4 R11: library part "RS_53k6 0603", "RES 53.6K OHM 1/10W 1% 0603 SMD"
R5 R12: library part "RS_40k2 0603", "RES 40.2K OHM 1/10W 1% 0603 SMD"
R6 R33 R34 R35 R41 R42 R43 R44 R45 R46 R50 R51 R52 R54: library part "RS_0R0 0603", "RES 0.0 OHM 1/10W 5% 0603 SMD"
R7: library part "RS_1k 0603", "RES 1.00K OHM 1/10W 1% 0603 SMD"
R8: library part "RS_42k2 0603", "RES 42.2K OHM 1/10W 1% 0603 SMD"
R9 R29: library part "RS_330R 0603", "RES 330 OHM 1/10W 1% 0603 SMD"
R16 R20 R21 R22 R23 R24 R25 R31 R32: library part "RS_100k 0603", "RES 100K OHM 1/10W 1% 0603 SMD"
R26: library part "RS_180R 0603", "RES 180OHM 1/10W 1% 0603 SMD"
R27 R30: library part "RS_5k6 0603", "RES 5.6K OHM 1/10W 5% 0603 SMD"
R36 R37 R38 R39 R40: library part "RS_10k 0603_1", "RES 10.0K OHM 1/10W 1% 0603 SMD"
R53: library part "RS_523R 0603", "RES 523 OHM 1/10W 1% 0603 SMD"
SW1 SW2: library part "SW_TACT 3MM RT", "SWITCH TACT RT ANG SPST SMD"
U1 U2: "IC REG STP-DWN 2A 12-DFN"
U3: library part IC_MIC5247-1.8YM5, "1.8V linear regulator"
U4: library part IC_LM2665, "Switched Capacitor Voltage Converter"
U5: library part IC_SC16C852LIB-S, "Dual high speed UARTs, bus connected"
U6: library part IC_PCA9306DC, "IC LEVEL TRANSLATOR I2C BUS 8VSSOP"
U7 U8: "IC VOLT-LEVEL TRANSLATOR 16TSSOP"
U9: "IC VOLT-LEVEL TRANSLATOR 14TSSOP"
U10: "IC VOLT-LEVEL TRANSLATOR 20TSSOP"
Y1: library part XT_18.432MHZ, "CRYSTAL 18.432MHZ LOW PRO SMD"

## Free pads (board coordinates)
  round 0 hole 118.11: ""(0,0) ""(0,1724.41) ""(1724.41,0) ""(1724.41,1724.41)

## Via types
v1: diameter 50, hole 28, Top Layer to Bottom Layer, 78 vias
v2: diameter 30, hole 15, Top Layer to Bottom Layer, 78 vias

## Nets (pads, with @x,y where several pads share a name; then routed paths per layer and width w, separated by ;. In a path a pad name is that pad's centre, name@x,y a point inside that pad or via, vN(x,y) a via of type N, cw(c..) or ccw(c..) an arc to the next point about the centre after c; other vN are vias at no path point)
EX_REF: P1.1 R35.1 R43.1 R46.1 R52.1 | length 3817.3
  MidLayer1 w20: v1(1199.33,535.83) 1139.33,475.83 1003.04,475.83 758.04,720.83 v1(754.33,720.83) 754.33,750.83 729.33,775.83 517.95,775.83 384.18,909.59 384.18,950.68 549.33,1115.83 1604.33,1115.83 1634.33,1145.83 v1(1634.33,1260.83)
  Bottom Layer w20: v1(754.33,720.83) R46.1@754.33,791.77 ; R43.1@854.33,1449.88 888.39,1449.88 954.33,1515.83 1217.31,1515.83 1307.31,1425.83 1325.03,1408.11 1373.64,1408.11 1377.95,1412.42 1398.68,1412.42 R35.1@1434.33,1376.77 1500.28,1310.83 1584.33,1310.83 v1(1634.33,1260.83) ; R52.1@1174.33,469.88 1174.33,510.83 v1(1199.33,535.83)
  Bottom Layer w30: P1.1@769.72,1648.78 769.72,1610.43 854.33,1525.83 R43.1@854.33,1454.63
GND: C1.1 C2.1 C6.2 C7.2 C8.1 C9.2 C11.2 C13.2 C14.2 C15.1 C16.2 C19.2 C20.2 C21.1 C22.1 C23.1 C24.2 C25.1 C26.1 C27.1 C28.2 C29.2 C30.1 C31.1 C32.1 C33.1 C34.1 C35.1 C36.1 C37.1 D4.1 D5.1 D8.1 D9.1 JP1.50 JP1.56 JP1.70 JP1._3 JP1._33 L3.2 L4.2 P1.2 P2.5 P3.4 P5.4 P6.4 P7.4 P8.1 P8.2 P9.6 P10.6 P11.2 P12.1 P13.1 Q1.2 Q2.2 R2.1 R3.1 R4.1 R5.1 R7.1 R9.1 R10.1 R11.1 R12.1 R16.1 R29.2 R32.1 R53.2 R54.2 SW1.1 SW1.3 SW2.1 SW2.3 U1.13 U2.13 U3.2 U4.2 U4.4 U5.17 U6.1 U7.9 U8.9 U9.7 U10.11 | length 8742.1
  Top Layer w9: JP1._33@219.37,334.61 335.55,334.61 404.06,266.1 v1(404.06,221.1) ; JP1._3@219.37,807.05 193.11,807.05 182.02,818.14 182.02,913.52 239.33,970.83 239.33,990.78 v1(275.09,1026.54) ; P2.5@874.33,153.82 P2.5@877.32,150.83 P2.5@879.33,152.83 ; v1@874.33,255.83 v1(874.33,275.83) ; v1(969.33,1465.83) 981.02,1477.52 C8.1@1026.54,1477.52 1077.64,1477.52 1084.33,1470.83 ; v1(1714.33,230.83) 1724.33,240.83 JP1.70@1724.33,303.11 ; JP1.50@1727.24,618.07 1704.04,618.07 1697.15,611.18 1697.15,530.49 1704.06,523.58 JP1.56@1727.24,523.58 1767.09,523.58 1894.33,650.83 1894.33,700.83 ; C21.1@1734.33,970.83 1734.33,940.83 1744.33,930.83 1814.33,930.83 C22.1@1854.33,970.83 ; 1939.33,695.83 v1(1984.33,695.83)
  Top Layer w10: 234.33,1090.83 234.33,1177.01 274.33,1217.01 U2.13@274.33,1227.2 U2.13@274.33,1250.83 ; U4.2@914.33,990.83 U4.4@951.73,953.43 ; 1290.43,1087.17 1290.43,1177.01 1326.54,1213.11 U1.13@1326.54,1233.9 U1.13@1326.54,1257.52
  Top Layer w15: v1(275.09,1026.54) 313.62,1026.54 334.33,1005.83 C1.1@334.33,970.83 ; P3.4@385.83,150.83 385.83,202.87 v1(404.06,221.1) v1@404.33,221.38 ; U4.2@892.01,990.83 U4.2@914.33,990.83 ; U4.4@951.73,953.43 U4.4@976.65,953.43 1008.54,921.54 v1(1040.09,921.54) ; C20.2@964.57,1130.83 C20.2@964.57,1161.06 ; R5.1@1090.87,1147.17 1090.87,1197.32 v1(1105.09,1211.54) ; v1@1121.66,1228.11 C11.2@1170.87,1228.11 ; C24.2@1204.57,990.83 1244.38,990.83 v1(1285.09,1031.54) 1285.09,1081.82 1290.43,1087.17 ; P9.6@1437.36,72.87 1437.36,123.86 v1(1464.33,150.83) 1499.33,115.83 1624.33,115.83 1633.39,124.88 R54.2@1633.39,170.83 C2.1@1694.33,170.83 1694.33,200.83 1714.33,220.83 v1(1714.33,230.83) ; C23.1@1529.33,985.83 C23.1@1534.33,990.83 ; v2(1834.33,1024.83) 1854.33,1004.83 C22.1@1854.33,970.83 ; U3.2@1834.33,1162.01 1834.33,1195.83 1874.33,1235.83 v1(1904.33,1235.83) 1961.1,1235.83 P5.4@1992.28,1204.65
  Top Layer w20: v1(-55.67,150.83) -34.68,171.81 L4.2@16.93,171.81 ; R11.1@194.33,1090.83 234.33,1090.83 R10.1@274.33,1090.83 ; v1(554.33,1650.83) 554.33,1645.83 R53.2@554.33,1690.83 ; v1(812.09,956.54) 846.38,990.83 U4.2@892.01,990.83 ; C13.2@853.35,1233.43 C14.2@953.35,1233.43 ; P2.5@874.33,153.82 v1(874.33,275.83) ; R9.1@894.33,1690.83 v1(894.33,1645.83) v1(974.33,1645.83) R2.1@974.33,1690.83 ; v1(1074.33,105.83) 1124.33,105.83 1151.73,133.23 L3.2@1151.73,169.84 ; R4.1@1250.87,1087.17 1290.43,1087.17 R3.1@1330.87,1087.17 ; v1(1279.33,1670.83) v1@1294.33,1670.83 ; R16.1@1314.33,1690.83 v1@1294.33,1670.83 ; P11.2@1406.1,1770.83 1406.1,1682.6 1394.33,1670.83 v1@1294.33,1670.83 ; SW1.3@1934.33,-24.21 1979.29,-24.21 v1(2004.33,0.83) 2004.33,-86.1 SW1.1@2001.26,-89.17
  Top Layer w30: C20.2@964.57,1130.83 964.57,1161.06 1015.04,1211.54 v1(1105.09,1211.54) ; v1(1854.33,700.83) 1894.33,700.83 1979.33,700.83 v1(1984.33,695.83)
  Top Layer w40: v1(1324.33,1805.83) 1371.1,1805.83 P11.2@1406.1,1770.83 ; v1(1529.33,925.83) 1529.33,920.83 C23.1@1529.33,985.83
  Bottom Layer w9: v1@394.33,216.38 399.06,221.1 v1(404.06,221.1) ; U8.9@804.76,803.03 804.76,720.39 859.33,665.83 1124.33,665.83 v1(1159.33,630.83) ; v1(874.33,275.83) 874.33,255.83 854.33,235.83 854.33,150.83 884.33,120.83 884.33,76.69 P12.1@888.15,72.87 ; P8.1@1984.33,649.45 P8.1@1992.28,641.5 ; P7.4@1991.1,1055.83 P7.4@1992.28,1057.01 ; P6.4@1992.28,1477.01 P6.4@1994.33,1474.96
  Bottom Layer w15: U5.17@205.71,490.43 205.71,399.45 223.62,381.54 v1(305.09,381.54) ; C25.1@214.33,990.83 239.38,990.83 v1(275.09,1026.54) ; C27.1@414.33,490.83 C26.1@494.33,490.83 520.09,516.58 v1(520.09,551.54) ; v1(597.09,991.54) 634.33,1028.78 C31.1@634.33,1050.83 ; U7.9@946.54,1300.39 1003.95,1300.39 1014.38,1310.83 v1(1034.33,1310.83) ; C35.1@1034.33,870.83 1034.33,915.78 v1(1040.09,921.54) ; v1(1109.33,350.83) C34.1@1174.33,350.83 ; 1174.33,89.84 R29.2@1174.33,190.83 ; C33.1@1334.33,530.83 1339.33,535.83 v1(1394.33,535.83) ; C28.2@1395.28,1510.83 1394.33,1509.88 v2(1394.33,1470.83) 1399.33,1475.83 1497.68,1475.83 U6.1@1523.15,1501.3 ; v1@1464.33,160.83 1469.49,165.98 U10.11@1469.49,238.62 ; U9.7@1657.56,418.62 1657.56,342.6 1714.33,285.83 v1(1714.33,230.83) ; C29.2@1774.33,1451.77 1775.28,1450.83 v1(1839.33,1450.83)
  Bottom Layer w20: v1(-55.67,150.83) -15.67,190.83 R32.1@-5.67,190.83 ; v1(-35.67,1550.83) 47.72,1550.83 Q2.2@96.93,1501.61 ; v1(309.33,1610.83) 309.33,1560.83 388.54,1481.61 Q1.2@416.93,1481.61 ; SW2.3@514.33,1725.87 524.29,1725.87 554.33,1695.83 ; v1(554.33,1650.83) 554.33,1645.83 554.33,1695.83 ; SW2.1@581.26,1790.83 581.26,1722.76 554.33,1695.83 ; P1.2@818.94,1648.78 821.89,1645.83 v1(894.33,1645.83) ; C32.1@1034.33,550.83 1056.48,550.83 1080.06,574.4 1127.91,574.4 1159.33,605.83 v1(1159.33,630.83) ; v1(1074.33,105.83) 1158.35,105.83 1174.33,89.84 P10.6@1191.3,72.87 ; v1@1714.41,230.83 1774.41,290.83 C30.1@1814.33,290.83 ; v1(1949.33,1010.35) 1949.33,1014.06 P7.4@1992.28,1057.01 ; P8.1@1984.33,649.45 v1(1984.33,695.83) ; P8.2@1992.28,592.28 P8.1@1992.28,641.5 ; v1(1994.33,1425.83) P6.4@1994.33,1474.96
  Bottom Layer w30: v1(404.06,221.1) 404.06,151.1 428.15,127.01 P13.1@428.15,72.87 ; C37.1@1034.33,1210.83 1104.38,1210.83 v1(1105.09,1211.54) ; v1(1714.33,230.83) v1@1714.41,230.83 ; C36.1@1814.33,730.83 1824.33,730.83 v1(1854.33,700.83)
  other v1: 249.33,1595.83 1599.33,1725.83
NetC5_1: C5.1 D4.2 L1.1 U1.12 | length 236.9
  Top Layer w10: U1.12@1383.62,1301.81 1415.53,1301.81 1439.82,1277.52 C5.1@1466.54,1277.52 ; L1.1@1563.5,1333.94 L1.1@1563.5,1357.52
  Top Layer w20: C5.1@1466.54,1277.52 1507.09,1277.52 L1.1@1563.5,1333.94
NetC5_2: C5.2 D1.2 U1.11 | length 289.2
  Top Layer w10: U1.11@1383.62,1284.09 1407.76,1284.09 1426.26,1265.59 1426.26,1224.25 1432.05,1218.46 C5.2@1466.54,1218.46
  Top Layer w20: C5.2@1466.54,1218.46 1466.54,1184.96 1524.33,1127.17 D1.2@1563.94,1127.17
NetC8_2: C8.2 C9.1 C15.2 C16.1 D2.2 D5.2 D9.2 U1.1 U2.1 | length 1780.5
  Top Layer w20: D9.2@46.46,1431.77 D9.2@74.33,1403.9 ; C16.1@207.4,1403.9 C16.1@214.33,1410.83 217.24,1407.91 217.24,1302.99 ; D5.2@1118.66,1418.46 D5.2@1146.54,1390.59 1217.6,1390.59 1244.53,1417.52 1286.54,1417.52 1286.54,1358.15 1269.76,1341.38 U1.1@1269.76,1305.95
  Top Layer w25: C15.2@-45.67,1431.77 D9.2@46.46,1431.77
  Top Layer w30: D9.2@74.33,1403.9 C16.1@207.4,1403.9 ; C16.1@214.33,1410.83 289.06,1485.55 293.19,1481.42 375.47,1481.42 460.79,1566.73 803.43,1566.73 819.33,1550.83 819.33,1478.9 D2.2@894.33,1403.9 1011.97,1403.9 C8.2@1026.54,1418.46 D5.2@1118.66,1418.46
NetC10_1: C10.1 U1.5 | length 150.4
  Top Layer w10: C10.1@1166.54,1137.52 1166.54,1152.52 1244.96,1230.95 U1.5@1269.45,1230.95
NetC10_2: C10.2 R5.2 | length 80
  Top Layer w10: R5.2@1090.87,1088.11 C10.2@1170.87,1088.11
NetC11_1: C11.1 U1.3 | length 107.2
  Top Layer w10: C11.1@1170.87,1287.17 1207.83,1287.17 1228.62,1266.38 U1.3@1269.45,1266.38
NetC12_1: C12.1 D8.2 L2.1 U2.12 | length 304.8
  Top Layer w10: D8.2@334.33,1403.9 331.42,1400.98 U2.12@331.42,1295.12 370.04,1295.12 C12.1@394.33,1270.83
  Top Layer w20: C12.1@394.33,1270.83 431.3,1270.83 L2.1@491.3,1330.83
NetC12_2: C12.2 D6.2 U2.11 | length 253.5
  Top Layer w10: U2.11@331.42,1277.4 349.49,1277.4 365.24,1261.65 365.24,1240.87 C12.2@394.33,1211.77 467.4,1138.7 D6.2@467.4,1090.83
NetC17_1: C17.1 U2.5 | length 133.3
  Top Layer w10: C17.1@114.33,1150.83 187.76,1224.25 U2.5@217.24,1224.25
NetC17_2: C17.2 R12.2 | length 80
  Top Layer w20: R12.2@34.33,1091.77 C17.2@114.33,1091.77
NetC18_1: C18.1 U4.6 | length 492.1
  Top Layer w15: C18.1@714.33,1050.83 714.33,1139.29 773.7,1198.66 884.92,1198.66 912.48,1171.1 912.48,1092.4 U4.6@976.65,1028.23
NetC18_2: C18.2 U4.3 | length 232.9
  Top Layer w20: C18.2@714.33,940.59 757.44,897.48 860.32,897.48 892.01,929.17 U4.3@892.01,953.43
NetC19_1: C19.1 U2.3 | length 95.8
  Top Layer w10: C19.1@134.33,1290.83 165.47,1259.69 U2.3@217.24,1259.69
NetC21_2: C21.2 U3.4 | length 90.3
  Top Layer w10: C21.2@1793.39,970.83 C21.2@1796.93,974.37
  Top Layer w15: C21.2@1796.93,974.37 U3.4@1796.93,1059.65
NetC26_2: C26.2 U5.13 Y1.1 | length 687.7
  Bottom Layer w9: U5.13@284.45,490.43 284.45,446.03 295.06,435.42 373.74,435.42 399.14,460.83 465.28,460.83 C26.2@494.33,431.77 648.39,431.77 674.33,405.83 Y1.1@674.33,351.54
  Bottom Layer w20: Y1.1@674.33,190.12 Y1.1@674.33,351.54
NetC27_2: C27.2 U5.14 Y1.2 | length 727.9
  Bottom Layer w9: U5.14@264.76,490.43 264.76,444.64 292.46,416.94 395.45,416.94 C27.2@409.33,430.83 ; C27.2@414.33,431.77 474.33,371.77 Y1.2@474.33,351.54 475.04,350.83 569.33,350.83 639.33,280.83 639.33,249.41 580.04,190.12 Y1.2@474.33,190.12
NetC29_1: C29.1 R38.1 U6.7 U6.8 | length 245.5
  Bottom Layer w10: U6.8@1625.51,1501.3 1684.8,1501.3 R38.1@1694.33,1510.83 1684.17,1520.98 U6.7@1625.51,1520.98 U6.8@1625.51,1501.3
  Bottom Layer w15: R38.1@1694.33,1510.83 C29.1@1774.33,1510.83
NetD3_2: D3.2 R2.2 | length 115.9
  Top Layer w20: R2.2@974.33,1749.88 1012.68,1788.23 D3.2@1074.33,1788.23
NetD7_2: D7.2 R9.2 | length 115.9
  Top Layer w20: D7.2@794.33,1788.23 855.98,1788.23 R9.2@894.33,1749.88
NetD11_2: D11.2 R16.2 | length 115.9
  Top Layer w15: D11.2@1214.33,1788.23 1275.98,1788.23 R16.2@1314.33,1749.88
NetD12_2: D12.2 R26.1 | length 115.9
  Top Layer w20: D12.2@354.33,1788.23 415.98,1788.23 R26.1@454.33,1749.88
NetD13_2: D13.2 R28.1 | length 149.1
  Top Layer w15: D13.2@211.73,1790.83 D13.2@214.33,1788.23
  Top Layer w20: v1(129.33,1790.83) D13.2@211.73,1790.83
  Bottom Layer w20: v1(129.33,1790.83) 129.33,1734.88 R28.1@134.33,1729.88
NetD14_1: D14.1 JP1.54 P2.1 P12.4 | length 2504.3
  Top Layer w9: JP1.54@1727.24,555.08 1758.58,555.08
  Top Layer w15: P2.1@751.34,150.83 751.34,552.83 1105.93,907.42 1243.68,907.42 1243.75,907.49 1467.67,907.49 1488.87,886.29 1559.79,886.29 1594.33,920.83 1624.33,920.83 1664.33,880.83 1754.33,880.83 1784.33,850.83 1784.33,580.83 1758.58,555.08
  Bottom Layer w20: P12.4@740.51,72.87 740.51,147.01 749.33,155.83 v1(749.33,217.87) 749.33,295.83 774.33,320.83 899.33,320.83 936.93,283.23 D14.1@936.93,190.83
NetD14_2: D14.2 R29.1 | length 103.5
  Bottom Layer w20: D14.2@1011.73,190.83 R29.1@1115.28,190.83
NetD15_2: D15.2 R32.2 | length 103.5
  Bottom Layer w20: R32.2@53.39,190.83 D15.2@156.93,190.83
NetD16_2: D16.2 R53.1 | length 115.9
  Top Layer w20: R53.1@554.33,1749.88 592.68,1788.23 D16.2@654.33,1788.23
NetJP1_1: JP1.1 SW1.2 | length 630.1
  Top Layer w9: JP1.1@1550.08,303.11 1586.61,303.11 v2(1599.33,315.83)
  Top Layer w15: SW1.2@1867.4,-89.17 v2@1867.4,13.9
  Bottom Layer w9: v2(1599.33,315.83) 1599.33,255.83 1694.33,160.83 1789.33,160.83 1869.33,80.83 v2(1869.33,10.83)
NetJP1_2: JP1.2 U10.3 | length 379
  Top Layer w9: v2(1499.33,305.83) 1512.36,318.86 JP1.2@1550.08,318.86
  Bottom Layer w9: U10.3@1290.35,463.03 1290.35,379.8 1324.33,345.83 1459.33,345.83 v2(1499.33,305.83)
NetJP1_3: JP1.3 U10.1 | length 409.2
  Top Layer w9: v2(1244.33,395.83) 1244.33,380.83 1290.55,334.61 JP1.3@1550.08,334.61
  Bottom Layer w9: U10.1@1239.17,463.03 1239.17,400.98 v2(1244.33,395.83)
NetJP1_4: JP1.4 U10.5 | length 299.4
  Top Layer w9: v2(1339.33,400.83) 1339.33,394.9 1383.87,350.35 JP1.4@1550.08,350.35 JP1.4@1549.26,351.17
  Bottom Layer w9: v2(1339.33,400.83) 1341.54,403.03 U10.5@1341.54,463.03
NetJP1_5: JP1.5 U10.7 | length 340.8
  Top Layer w9: JP1.5@1550.08,366.1 v2@1594.33,366.1
  Bottom Layer w9: U10.7@1392.72,463.03 1392.72,427.44 1419.33,400.83 1483.4,400.83 1483.81,401.23 1558.93,401.23 v2(1594.33,365.83)
  Bottom Layer w10: U10.7@1392.72,463.03 1392.72,432.44 U10.7@1394.74,430.42
NetJP1_6: JP1.6 U10.4 | length 327.1
  Top Layer w9: v2(1494.33,375.83) 1500.35,381.85 JP1.6@1550.08,381.85
  Bottom Layer w9: U10.4@1315.95,463.03 1313.93,461.01 1313.93,386.23 1334.74,365.42 1488.93,365.42 v2@1494.33,370.83
NetJP1_7: JP1.7 U10.6 | length 254
  Top Layer w9: v2(1379.33,390.83) 1469.33,390.83 1479.96,401.45 1513.71,401.45 1517.56,397.6 JP1.7@1550.08,397.6
  Bottom Layer w9: U10.6@1367.13,463.03 1367.13,423.03 1379.33,410.83 v2(1379.33,390.83)
NetJP1_10: JP1.10 R37.1 U6.4 | length 2744.2
  Top Layer w9: v2(1451.68,853.48) 1457.18,847.98 1520.58,847.98 1526.08,853.48 1576.68,853.48 1652.44,777.72 1652.44,488.93 1608.35,444.84 JP1.10@1550.08,444.84
  MidLayer2 w9: v2(1451.68,853.48) 1566.68,853.48 1574.33,845.83 1944.33,845.83 2169.33,1070.83 2169.33,1600.83 2099.33,1670.83 1769.06,1670.83 1741.37,1643.14 1652.02,1643.14 v2(1624.33,1670.83) v2@1624.33,1665.83
  Bottom Layer w10: U6.4@1523.15,1560.35 1523.15,1569.65 1564.33,1610.83 R37.1@1574.33,1610.83 1574.33,1617.46 1613.6,1656.73 1620.24,1656.73 v2@1624.33,1660.83
NetJP1_13: JP1.13 R36.1 U6.3 | length 2592.9
  Top Layer w9: v2(1399.33,860.83) 1399.33,595.83 1503.07,492.09 JP1.13@1550.08,492.09
  MidLayer2 w10: v2(1399.33,860.83) 1419.74,881.23 1544.74,881.23 1557.24,893.74 1615.15,893.74 1623.96,884.92 1938.43,884.92 2149.33,1095.83 2149.33,1530.83 2090.24,1589.92 2088.6,1589.92 2072.7,1605.83 1649.33,1605.83 v2(1624.33,1630.83)
  Bottom Layer w10: R36.1@1454.33,1610.83 1454.33,1570.83 1484.11,1541.04 U6.3@1522.78,1541.04 ; U6.3@1523.15,1540.67 1526.02,1543.54 1552.05,1543.54 1624.33,1615.83 v2(1624.33,1630.83) v2@1624.33,1620.83
NetJP1_22: JP1.22 R31.2 SW2.2 | length 2893.5
  Top Layer w9: JP1.22@1550.08,633.82 1587.32,633.82 1594.33,640.83 v2(1594.33,710.83)
  MidLayer1 w9: 359.3,900.79 794.26,465.83 864.33,465.83 899.74,430.42 1373.93,430.42 1594.33,650.83 v2(1594.33,710.83) ; 359.33,900.79 359.33,960.83 514.33,1115.83 v2(514.33,1410.83)
  Bottom Layer w15: R31.2@374.33,1809.88 343.39,1809.88 324.33,1790.83 324.33,1740.83 414.33,1650.83 414.33,1550.83 454.33,1510.83 454.33,1430.83 474.33,1410.83 v2(514.33,1410.83)
  Bottom Layer w20: R31.2@374.33,1809.88 428.35,1809.88 SW2.2@447.4,1790.83
NetJP1_26: JP1.26 U7.6 | length 1141.7
  Top Layer w9: v2(1429.33,790.83) 1429.33,745.83 1478.35,696.81 JP1.26@1550.08,696.81
  Bottom Layer w9: U7.6@722.13,1249.21 790.95,1249.21 804.43,1235.73 804.43,1135.73 879.33,1060.83 964.33,1060.83 1234.33,790.83 v2(1429.33,790.83)
NetJP1_29: JP1.29 U10.9 | length 502
  Top Layer w9: JP1.29@1550.08,744.06 1601.1,744.06 1622.63,722.53 1622.63,539.12 v2(1594.33,510.83) ; v2@1599.33,505.83 v2@1604.33,505.83
  Bottom Layer w9: U10.9@1443.9,463.03 1443.9,500.39 1454.33,510.83 v2(1594.33,510.83)
NetJP1_31: JP1.31 U7.7 | length 1083.1
  Top Layer w9: v2(1494.33,790.83) 1499.33,790.83 1513.79,776.37 1549.26,776.37 JP1.31@1550.08,775.55
  Bottom Layer w9: U7.7@722.13,1274.8 723.15,1275.83 785.41,1275.83 819.33,1241.91 819.33,1160.83 889.33,1090.83 955.89,1090.83 1220.89,825.83 1430.26,825.83 1465.26,790.83 v2(1494.33,790.83)
NetJP1_33: JP1.33 U10.8 | length 646
  Top Layer w9: JP1.33@1550.08,807.05 1588.11,807.05 1637.53,757.63 1637.53,514.03 v2(1594.33,470.83)
  Bottom Layer w9: U10.8@1418.31,463.03 1418.31,437.59 1436.73,419.16 1547.67,419.16 1594.33,465.83 v2(1594.33,470.83)
NetJP1_36: JP1.36 P2.3 P12.2 | length 1793.3
  Top Layer w9: P2.3@814.33,150.83 v2(814.33,217.87) 814.74,218.28 814.74,276.35 814.33,276.76 814.33,320.83 839.33,345.83 979.33,345.83 1054.33,270.83 1594.33,270.83 1667.34,343.84 1667.34,818.84 1686.52,838.02 1726.72,838.02 JP1.36@1727.24,838.54
  Bottom Layer w9: v2(814.33,217.87) 814.33,165.83 838.94,141.22 P12.2@838.94,72.87